# Altium PCB HandTiePCB.PcbDoc
Units mil, origin at the board's own origin, x right, y up, seen from the top; angles counter-clockwise.
Board outline 6000 x 4000 mil, 2 copper layers (Top Layer, Bottom Layer); 49 components, 53 nets, 217 pads, 0 vias.
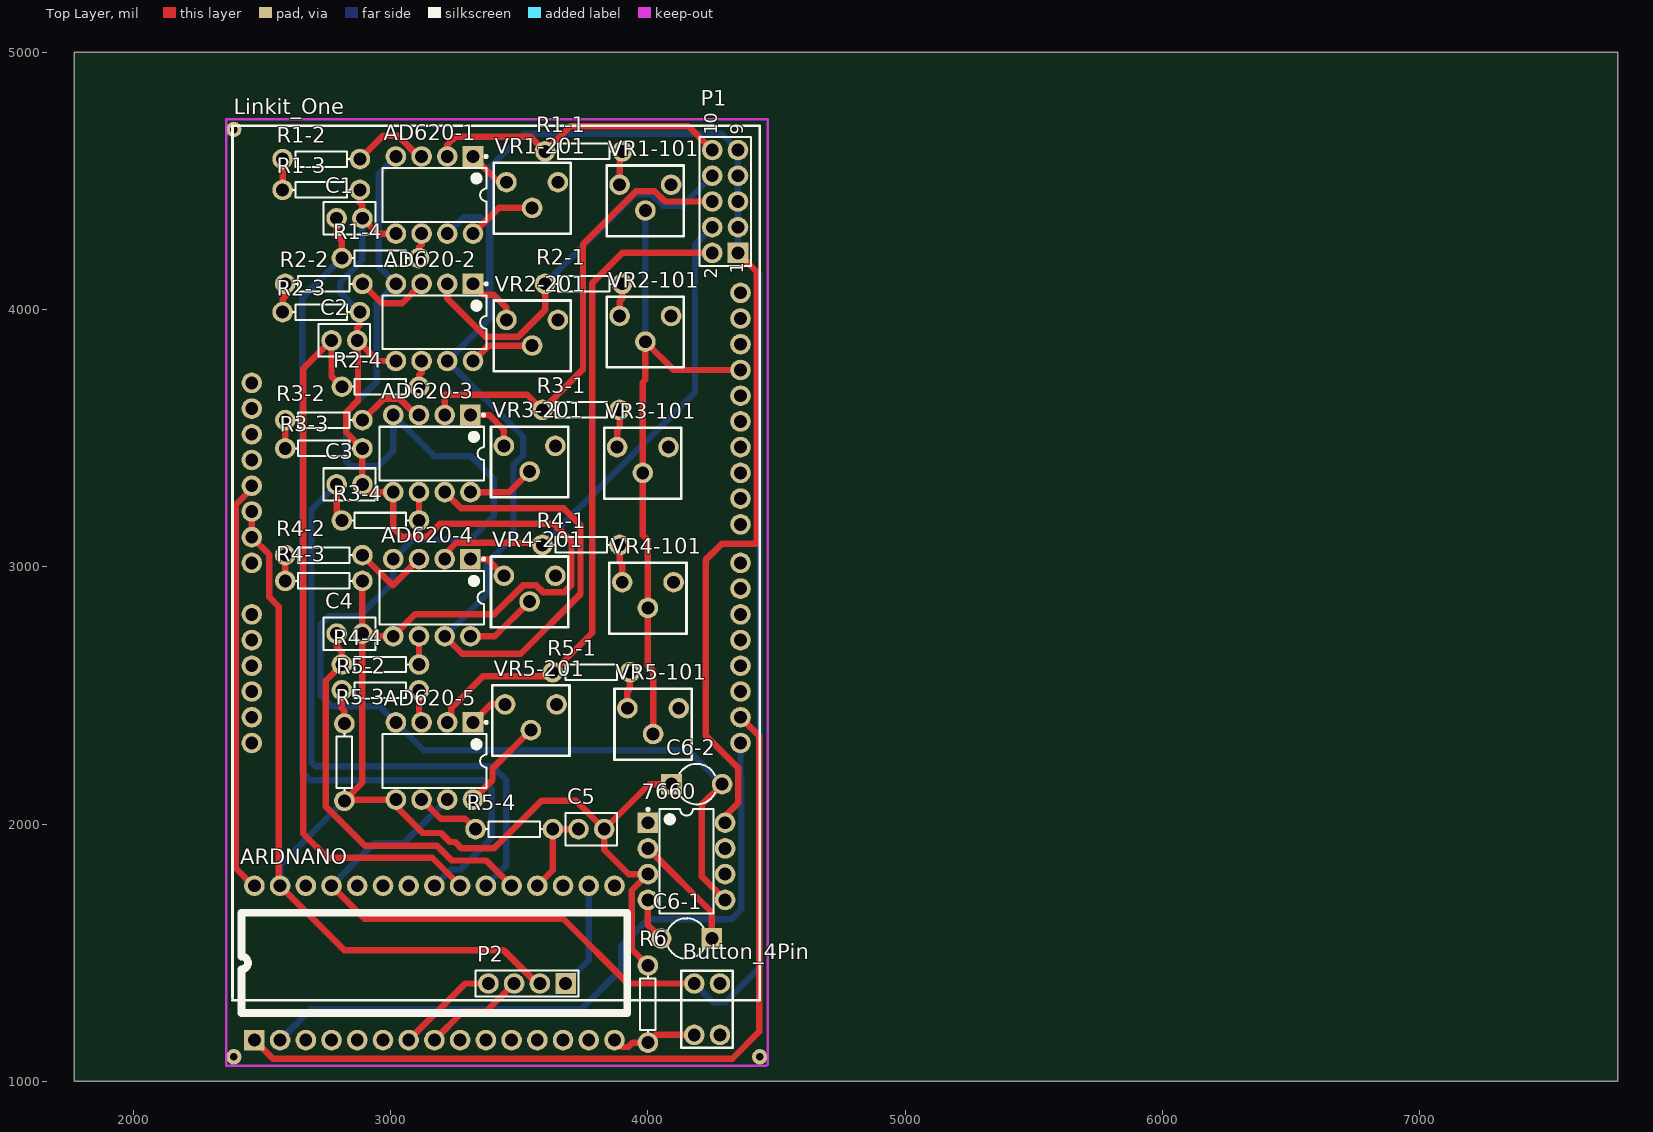
[diagram p0: Top Layer view]
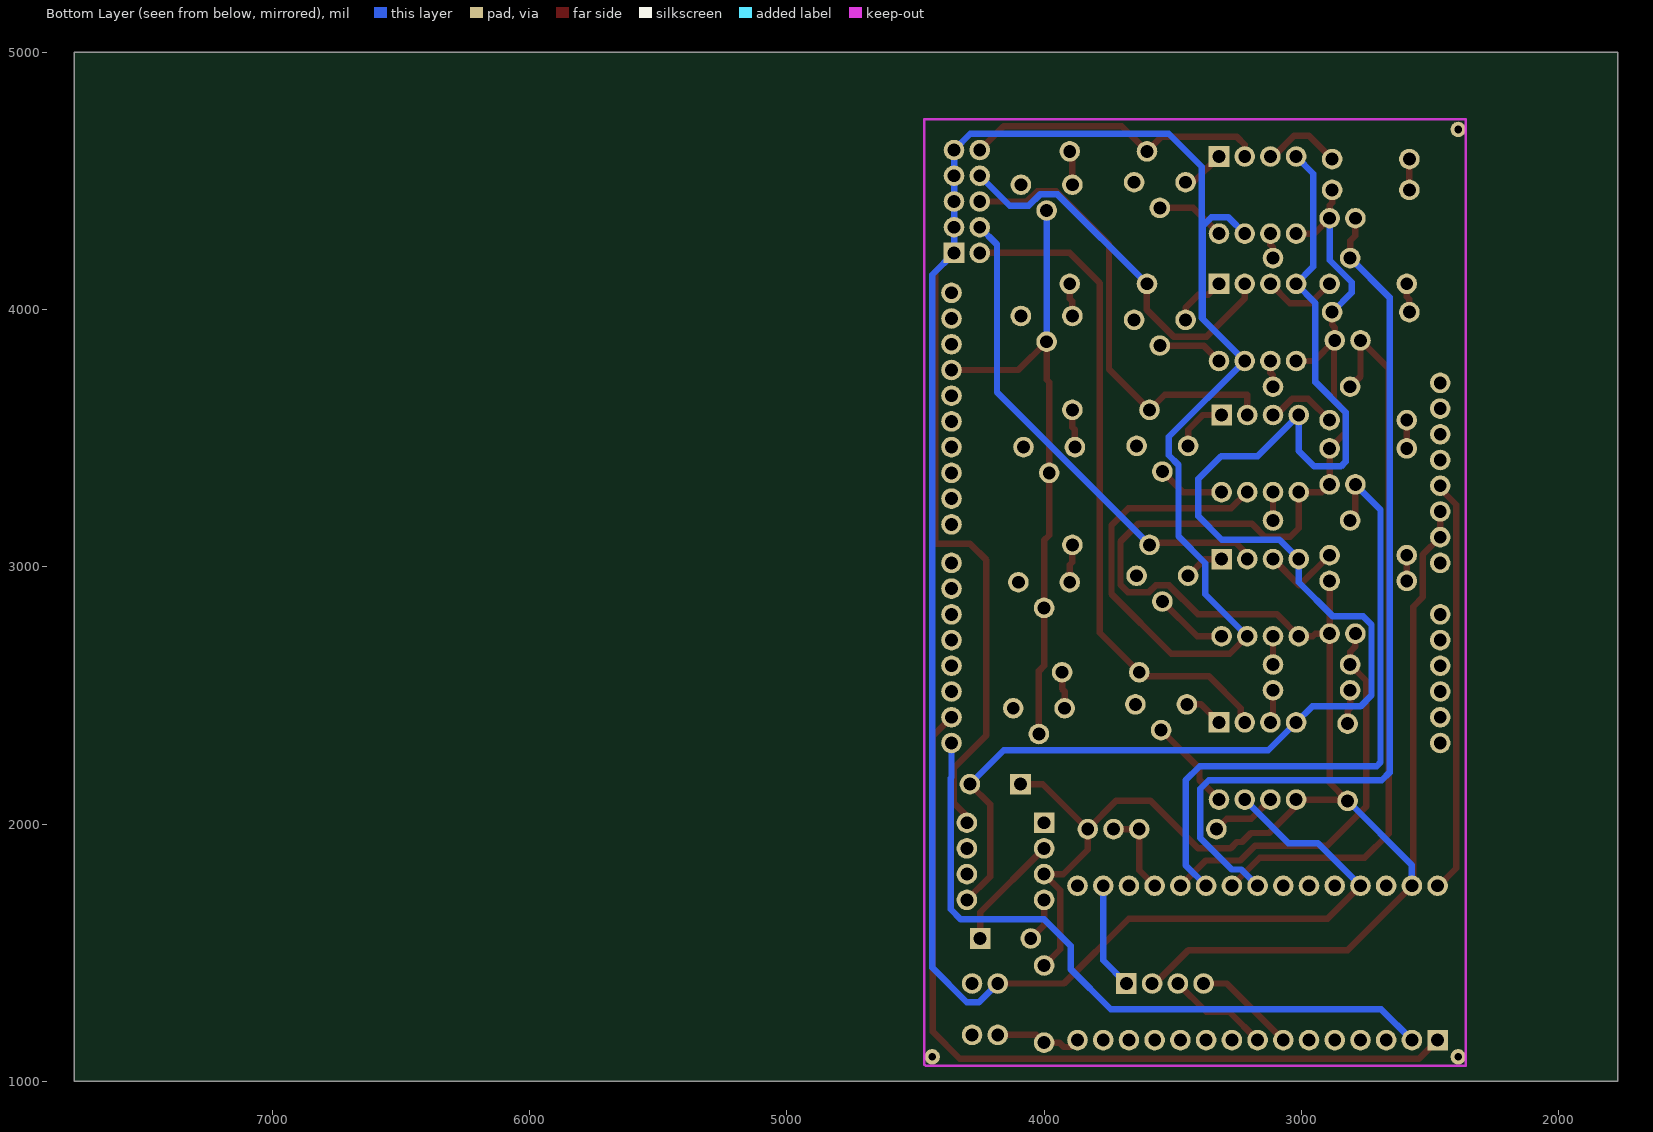
[diagram p1: Bottom Layer view, seen from below]

## Layer stack, top to bottom
Top Layer: signal copper 1.4
Dielectric: dielectric 12.6, FR-4, Dk 4.8
Bottom Layer: signal copper 1.4

## Board outline
1770,1000 7770,1000 7770,5000 1770,5000

## Design rules (kind name [scope] priority, off if disabled: settings)
Clearance [All] p1: gap=10
PolygonConnect [All] p1: connectstyle=Relief reliefconductorwidth=10 reliefentries=4 polygonreliefangle="90 Angle"
RoutingLayers [All] p1: top layer_v5=FALSE bottom layer_v5=TRUE
RoutingVias [All] p1: holewidth=28 width=50 viastyle="Through Hole" minholewidth=28 minwidth=50 maxholewidth=28 maxwidth=50
SilkscreenOverComponentPads [All] p1: minsilkscreentomaskgap=10
SolderMaskExpansion [All] p1: expansion=4
Width [All] p1: maxlimit=25 minlimit=25 preferedwidth=25
26 further rules are at their usual default settings.

## Components (designator, comment, footprint, x,y, rotation, side; value= is the part's Value field where it differs from the comment)
7660 "SW-DIP4" DIP-8 4150,1855 r0 top
AD620-1 "SW-DIP4" DIP-8 3170,4445 r270 top
AD620-2 "SW-DIP4" DIP-8 3170,3950 r270 top
AD620-3 "SW-DIP4" DIP-8 3160,3440 r270 top
AD620-4 "SW-DIP4" DIP-8 3160,2880 r270 top
AD620-5 "SW-DIP4" DIP-8 3170,2245 r270 top
ARDNANO "Arduino Nano" ARDNANO_DIP30 2470,1160 r90 top
Button_4Pin "Button_4Pin" Button_4Pin 4180,1180 r90 top
C1 "Cap" CAPR2.54-5.1x3.2 2840,4355 r0 top
C2 "Cap" CAPR2.54-5.1x3.2 2820,3880 r0 top
C3 "Cap" CAPR2.54-5.1x3.2 2840,3320 r0 top
C4 "Cap" CAPR2.54-5.1x3.2 2840,2740 r0 top
C5 "Cap" CAPR2.54-5.1x3.2 3780,1980 r0 top
C6-1 "Cap2" CAPR5-4X5 4150,1555 r180 top
C6-2 "Cap2" CAPR5-4X5 4190,2155 r0 top
Linkit_One "Linkit_One" Linkit_One 2460,3715 r0 top
P1 "Header 5X2" HDR2X5 4350,4220 r90 top
P2 "Header 4" HDR1X4 3680,1380 r180 top
R1-1 "Res1" AXIAL-0.3 3750,4615 r180 top
R1-2 "Res1" AXIAL-0.3 2730,4585 r0 top
R1-3 "Res1" AXIAL-0.3 2730,4465 r180 top
R1-4 "Res1" AXIAL-0.3 2960,4200 r0 top
R2-1 "Res1" AXIAL-0.3 3750,4100 r180 top
R2-2 "Res1" AXIAL-0.3 2740,4100 r0 top
R2-3 "Res1" AXIAL-0.3 2730,3990 r180 top
R2-4 "Res1" AXIAL-0.3 2960,3700 r0 top
R3-1 "Res1" AXIAL-0.3 3740,3610 r180 top
R3-2 "Res1" AXIAL-0.3 2740,3570 r0 top
R3-3 "Res1" AXIAL-0.3 2740,3460 r180 top
R3-4 "Res1" AXIAL-0.3 2960,3180 r0 top
R4-1 "Res1" AXIAL-0.3 3740,3085 r180 top
R4-2 "Res1" AXIAL-0.3 2740,3045 r0 top
R4-3 "Res1" AXIAL-0.3 2740,2945 r180 top
R4-4 "Res1" AXIAL-0.3 2960,2620 r0 top
R5-1 "Res1" AXIAL-0.3 3780,2590 r180 top
R5-2 "Res1" AXIAL-0.3 2960,2520 r0 top
R5-3 "Res1" AXIAL-0.3 2820,2240 r90 top
R5-4 "Res1" AXIAL-0.3 3480,1980 r180 top
R6 "Res1" AXIAL-0.3 4000,1300 r90 top
VR1-101 "VR" VarResistor 4090,4485 r180 top
VR1-201 "VR" VarResistor 3650,4495 r180 top
VR2-101 "VR" VarResistor 4090,3975 r180 top
VR2-201 "VR" VarResistor 3650,3960 r180 top
VR3-101 "VR" VarResistor 4080,3465 r180 top
VR3-201 "VR" VarResistor 3640,3470 r180 top
VR4-101 "VR" VarResistor 4100,2940 r180 top
VR4-201 "VR" VarResistor 3640,2965 r180 top
VR5-101 "VR" VarResistor 4120,2450 r180 top
VR5-201 "VR" VarResistor 3645,2465 r180 top

## Footprints (in the part's own frame and the unit in brackets; to place one, negate y for a bottom-side part, rotate by r counter-clockwise, add the part's x,y. Pads: shape width x height; smd on the part's side, far side on the other; paste and mask are expansions set on the pad)
ARDNANO_DIP30 [mil]
  rect 80x80 hole 50 mask+4: 1(0,0)
  round 80 hole 50 mask+4: 2(0,-100) 3(0,-200) 4(0,-300) 5(0,-400) 6(0,-500) 7(0,-600) 8(0,-700) 9(0,-800) 10(0,-900) 11(0,-1000) 12(0,-1100) 13(0,-1200) 14(0,-1300) 15(0,-1400) 16(600,-1400) 17(600,-1300) 18(600,-1200) 19(600,-1100) 20(600,-1000) 21(600,-900) 22(600,-800) 23(600,-700) 24(600,-600) 25(600,-500) 26(600,-400) 27(600,-300) 28(600,-200) 29(600,-100) 30(600,0)
  silkscreen extent 105,-1450 495,50
AXIAL-0.3 [mil] "Axial Device, Thru-Hole; 2 Leads; 0.3 in Pin Spacing"
  round 80 hole 50 mask+4: 1(-150,0) 2(150,0)
  silkscreen extent -109,-30 109,30
Button_4Pin [mil]
  round 80 hole 50 mask+4: 1(0,0) 2(0,-100) 3(200,-100) 4(200,0)
  silkscreen extent -50,-150 250,50
CAPR2.54-5.1x3.2 [mil] "Capacitor, Ceramic, Thru-Hole, Dipped Radial; Body 5.1 x 3.2 mm (WxT) Pin Spacing 2.54 mm (typ)"
  round 80 hole 50 mask+4: 1(-50,0) 2(50,0)
  silkscreen extent -100,-63 100,63
CAPR5-4X5 [mil] "Capacitor; 2 Leads"
  rect 80x80 hole 50 mask+4: 1(-98.43,0)
  round 80 hole 50 mask+4: 2(98.43,0)
  silkscreen extent -66,-79 72,79
DIP-8 [mil] "DIP; 8 Leads; Row Spacing 7.62 mm; Pitch 2.54 mm"
  rect 80x80 hole 50 mask+4: 1(-150,150)
  round 80 hole 50 mask+4: 2(-150,50) 3(-150,-50) 4(-150,-150) 5(150,-150) 6(150,-50) 7(150,50) 8(150,150)
  silkscreen extent -155,-203 104,206, body extent -142,-203 142,203, height 200
HDR1X4 [mil] "Connector; Header; 4 Position"
  rect 80x80 hole 50: 1(0,0)
  round 80 hole 50: 2(100,0) 3(200,0) 4(300,0)
  silkscreen extent -50,-50 350,50
HDR2X5 [mil] "Connector; Header; 5x2 Position"
  rect 80x80 hole 50: 1(0,0)
  round 80 hole 50: 2(0,100) 3(100,0) 4(100,100) 5(200,0) 6(200,100) 7(300,0) 8(300,100) 9(400,0) 10(400,100)
  silkscreen extent -50,-50 450,150
Linkit_One [mil]
  round 80 hole 50 mask+4: 1(0,0) 2(0,-100) 3(0,-200) 4(0,-300) 5(0,-400) 6(0,-500) 7(0,-600) 8(0,-700) 9(0,-900) 10(0,-1000) 11(0,-1100) 12(0,-1200) 13(0,-1300) 14(0,-1400) 15(1900,-1400) 16(1900,-1300) 17(1900,-1200) 18(1900,-1100) 19(1900,-1000) 20(1900,-900) 21(1900,-800) 22(1900,-700) 23(1900,-550) 24(1900,-450) 25(1900,-350) 26(1900,-250) 27(1900,-150) 28(1900,-50) 29(1900,50) 30(1900,150) 31(1900,250) 32(1900,350)
  silkscreen extent -75,-2400 1975,1000
VarResistor [mil]
  round 80 hole 50 mask+4: 1(0,0) 2(100,100) 3(200,0)
  silkscreen extent -50,-75 250,200

## Part data
7660 AD620-1 AD620-2 AD620-3 AD620-4 AD620-5: "DIP Switch"
C1 C2 C3 C4 C5 C6-1 C6-2: "Capacitor"
P1: "Header, 5-Pin, Dual row"
P2: "Header, 4-Pin"
R1-1 R1-2 R1-3 R1-4 R2-1 R2-2 R2-3 R2-4 R3-1 R3-2 R3-3 R3-4 R4-1 R4-2 R4-3 R4-4 R5-1 R5-2 R5-3 R5-4 R6: "Resistor"
VR1-101 VR1-201 VR2-101 VR2-201 VR3-101 VR3-201 VR4-101 VR4-201 VR5-101 VR5-201: library part VarR

## Free pads (board coordinates)
  round 60 hole 30: 0(2390,4700) 1(2390,1095) 2(4435,1095)

## Nets (pads, with @x,y where several pads share a name; then routed paths per layer and width w, separated by ;. In a path a pad name is that pad's centre, name@x,y a point inside that pad or via, vN(x,y) a via of type N, cw(c..) or ccw(c..) an arc to the next point about the centre after c; other vN are vias at no path point)
GND: 7660.3 AD620-1.5 AD620-2.5 AD620-3.5 AD620-4.5 AD620-5.5 ARDNANO.29 C1.2 C2.2 C3.2 C4.2 C5.2 C6-2.1 Linkit_One.6 Linkit_One.7 P2.2 R1-3.1 R2-3.1 R3-3.1 R4-3.1 R5-3.1 R6.2 | length 9965
  Top Layer w25: Linkit_One.6 Linkit_One.7 2527.5,3047.5 2527.5,2882.5 2565,2845 ARDNANO.29@2565,1765 ; ARDNANO.29@2565,1755 ARDNANO.29@2565,1765 ; R5-3.1 R5-3.1@2825,2095 ; R2-3.1 2880,3940 2870,3930 C2.2 ; R1-3.1 2880,4415 2890,4405 C1.2 2950,4295 AD620-1.5 ; R4-3.1 C4.2 ; AD620-2.5 2950,3800 C2.2 ; P2.2@3575,1380 3568.39,1380 3438.39,1510 2820,1510 ARDNANO.29 ARDNANO.29@2565,1765 ; R6.2 3937,1513 3937,1742 7660.3 3925,1805 3830,1900 C5.2 ; C6-2.1 4005,2155 C5.2 ; R5-3.1@2825,2095 AD620-5.5 3020,2070 3125,1965 3195.2,1965 3230.2,1930 3250.49,1930 3275.49,1905 3401,1905 3587,2091 3719,2091 C5.2 ; R5-3.1@2825,2095 2890,2160 C4.2 ; C2.2 2873,3837 2873,3646 2827,3600 2827,3523 R3-3.1 C3.2 2920,3290 AD620-3.5 3010,3150 3043,3117 3142,3117 3193,3168 3633,3168 3703,3098 3703,2929.61 3675,2901.61 3591.78,2901.61 3565.89,2927.5 3514.11,2927.5 3402.61,2816 3096,2816 AD620-4.5 2955,2730 2945,2740 C4.2
  Bottom Layer w25: ARDNANO.29 2570,1840 R5-3.1 ; R2-3.1 2804,4066 2804,4105.61 2890,4191.61 C1.2
GND2: Linkit_One.29 VR1-101.2 VR2-101.2 VR3-101.2 VR4-101.2 VR5-101.2 | length 2471.3
  Top Layer w25: VR5-101.2 4020,2595 4000,2615 VR4-101.2 4000,3103 3980,3123 VR3-101.2 3980,3717 3990,3727 VR2-101.2 4100,3765 Linkit_One.29
  Bottom Layer w25: VR2-101.2 VR1-101.2
Net7660_2: 7660.2 C6-1.1 | length 452.9
  Top Layer w25: 7660.2 4248.43,1656.57 C6-1.1
Net7660_4: 7660.4 C6-1.2 | length 171.4
  Top Layer w25: 7660.4 4000,1606.57 C6-1.2
Net7660_5: 7660.5 AD620-1.4 AD620-2.4 AD620-3.4 AD620-4.4 AD620-5.4 C6-2.2 | length 5715.1
  Top Layer w25: C6-2.2 4210,2076.57 4210,1795 7660.5
  Bottom Layer w25: AD620-1.4 2953,4528 2953,4167 AD620-2.4 2945,4025 2945,3718 2827,3600 2827,3409 2846,3390 2950,3390 3010,3450 AD620-3.4 3170,3430 3312,3430 3400,3342 3400,3196 3309,3105 3085,3105 AD620-4.4 3010,2940 2877,2807 2759,2807 2727,2775 2727,2500 2770,2457 2958,2457 AD620-5.4 3128,2287 4156.43,2287 C6-2.2
NetAD620-1_1: AD620-1.1 VR1-201.3 | length 171.4
  Top Layer w25: AD620-1.1 3420,4495 VR1-201.3
NetAD620-1_2: AD620-1.2 P1.10 R1-1.2 | length 1190.3
  Top Layer w25: AD620-1.2 3220,4641 3250,4671 3544,4671 R1-1.2 3697.5,4712.5 4157.5,4712.5 P1.10
NetAD620-1_3: AD620-1.3 R1-2.2 | length 310.4
  Top Layer w25: R1-2.2 2970,4675 3028.39,4675 3108.39,4595 AD620-1.3
NetAD620-1_6: AD620-1.6 R1-4.2 | length 99.1
  Top Layer w25: R1-4.2 3110,4242 3120,4252 AD620-1.6
NetAD620-1_8: AD620-1.8 VR1-201.2 | length 271.4
  Top Layer w25: AD620-1.8 3420,4395 VR1-201.2
NetAD620-2_1: AD620-2.1 VR2-201.3 | length 215.8
  Top Layer w25: AD620-2.1 3362.5,4057.5 3400,4057.5 3450,4007.5 VR2-201.3
NetAD620-2_2: AD620-2.2 P1.8 R2-1.2 | length 1503.6
  Top Layer w25: AD620-2.2 3220,4043 3368,3895 3496.61,3895 3600,3998.39 R2-1.2
  Bottom Layer w25: R2-1.2 3947.5,4447.5 4015.89,4447.5 4060.39,4403 4133,4403 P1.8
NetAD620-2_3: AD620-2.3 R2-2.2 | length 292.1
  Top Layer w25: R2-2.2 2965,4025 3045,4025 AD620-2.3
NetAD620-2_6: AD620-2.6 R2-4.2 | length 104.1
  Top Layer w25: R2-4.2 3110,3745 3120,3755 AD620-2.6
NetAD620-2_8: AD620-2.8 VR2-201.2 | length 254.9
  Top Layer w25: AD620-2.8 3380,3860 VR2-201.2
NetAD620-3_1: AD620-3.1 VR3-201.3 | length 216.6
  Top Layer w25: AD620-3.1 3383,3590 3440,3533 VR3-201.3
NetAD620-3_2: AD620-3.2 P1.6 R3-1.2 | length 1797.1
  Top Layer w25: AD620-3.2 3210,3669 3531,3669 R3-1.2 3747.5,3767.5 3747.5,4254.11 3953.39,4460 4026.61,4460 4066.61,4420 P1.6
NetAD620-3_3: AD620-3.3 R3-2.2 | length 280.1
  Top Layer w25: R3-2.2 2972.5,3652.5 3035.89,3652.5 3098.39,3590 AD620-3.3
NetAD620-3_6: AD620-3.6 R3-4.2 | length 110
  Top Layer w25: R3-4.2 AD620-3.6
NetAD620-3_8: AD620-3.8 VR3-201.2 | length 263.1
  Top Layer w25: AD620-3.8 3460,3290 VR3-201.2
NetAD620-4_1: AD620-4.1 VR4-201.3 | length 156.9
  Top Layer w25: AD620-4.1 3375,3030 VR4-201.3
NetAD620-4_2: AD620-4.2 P1.4 R4-1.2 | length 1928.1
  Top Layer w25: AD620-4.2 3210,3047.64 3255.36,3093 3582,3093 R4-1.2
  Bottom Layer w25: R4-1.2 4183,3678 4183,4253 P1.4
NetAD620-4_3: AD620-4.3 R4-2.2 | length 311.1
  Top Layer w25: R4-2.2 3007.5,2927.5 AD620-4.3
NetAD620-4_6: AD620-4.6 R4-4.2 | length 110
  Top Layer w25: R4-4.2 AD620-4.6
NetAD620-4_8: AD620-4.8 VR4-201.2 | length 285.9
  Top Layer w25: AD620-4.8 3405,2730 VR4-201.2
NetAD620-5_1: AD620-5.1 VR5-201.3 | length 154
  Top Layer w25: AD620-5.1 3390,2465 VR5-201.3
NetAD620-5_2: AD620-5.2 P1.2 R5-1.2 | length 2606
  Top Layer w25: AD620-5.2 3235,2410 3235,2450 3360,2575 3615,2575 R5-1.2 3783,2743 3783,4103 3900,4220 P1.2
NetAD620-5_3: AD620-5.3 R5-2.2 | length 129.1
  Top Layer w25: R5-2.2 3110,2405 AD620-5.3
NetAD620-5_6: AD620-5.6 R5-4.2 | length 257.6
  Top Layer w25: AD620-5.6 3195,2020 3290,2020 R5-4.2
NetAD620-5_8: AD620-5.8 VR5-201.2 | length 363.2
  Top Layer w25: AD620-5.8 3395.75,2170.75 3395.75,2215.75 VR5-201.2
NetARDNANO_1: ARDNANO.1 Linkit_One.16 | length 3289
  Top Layer w25: ARDNANO.1 2542.5,1087.5 4327.5,1087.5 4433,1193 4433,2342 Linkit_One.16
NetARDNANO_2: ARDNANO.2 Linkit_One.15 | length 2705
  Bottom Layer w25: ARDNANO.2 2690,1280 3741,1280 3897,1436 3897,1527 4000,1630 4325,1630 4363,1668 4363,2178 4360,2181 Linkit_One.15
NetARDNANO_7: ARDNANO.7 P2.4 | length 401.1
  Top Layer w25: ARDNANO.7 3290,1380 P2.4
NetARDNANO_8: ARDNANO.8 P2.3 | length 401.1
  Top Layer w25: ARDNANO.8 3280,1270 3370,1270 P2.3
NetARDNANO_15: ARDNANO.15 Button_4Pin.1 R6.1 | length 340.7
  Top Layer w25: ARDNANO.15 3897,1133 3923,1133 3940,1150 R6.1 4030,1180 Button_4Pin.1
NetARDNANO_17: ARDNANO.17 P2.1 | length 417.3
  Bottom Layer w25: P2.1 3770,1470 ARDNANO.17
NetARDNANO_19: ARDNANO.19 C5.1 R5-4.1 | length 344.9
  Top Layer w25: ARDNANO.19 3630,1820 R5-4.1 C5.1
NetARDNANO_20: ARDNANO.20 C4.1 R4-4.1 | length 1557
  Top Layer w25: C4.1 2790,2690 2810,2670 R4-4.1 2747,2557 2747,2068 2900,1915 3180,1915 3237,1858 3372,1858 ARDNANO.20
NetARDNANO_21: ARDNANO.21 C3.1 R3-4.1 | length 2510.7
  Top Layer w25: C3.1 2790,3180 R3-4.1
  Bottom Layer w25: C3.1 2692,3222 2692,2240 2707,2225 3395,2225 3450,2170 3450,1840 ARDNANO.21
NetARDNANO_22: ARDNANO.22 C2.1 R2-4.1 | length 2852.8
  Top Layer w25: R2-4.1 2770,3740 C2.1 2660.5,3770.5 2660.5,1962.5 2754,1869 3161,1869 ARDNANO.22
NetARDNANO_23: ARDNANO.23 C1.1 R1-4.1 | length 3479.4
  Top Layer w25: C1.1 2790,4287 2810,4267 R1-4.1
  Bottom Layer w25: R1-4.1 2657,4047 2657,2200 2687,2170 3360,2170 3392.5,2137.5 3392.5,1945.5 3270,1823 3233,1823 ARDNANO.23
NetARDNANO_30: ARDNANO.30 Linkit_One.5 | length 1615.9
  Top Layer w25: Linkit_One.5 2460,3303.39 2397.5,3240.89 2397.5,1827.5 ARDNANO.30@2470,1755
NetR1-1_1: R1-1.1 VR1-101.3 | length 134.1
  Top Layer w25: VR1-101.3 3890,4605 R1-1.1
NetR1-2_1: R1-2.1 R1-3.2 | length 120
  Top Layer w25: R1-3.2 R1-2.1
NetR2-1_1: R2-1.1 VR2-101.3 | length 129.1
  Top Layer w25: VR2-101.3 3890,4032 3900,4042 R2-1.1
NetR2-2_1: R2-2.1 R2-3.2 | length 114.1
  Top Layer w25: R2-3.2 2580,4040 2590,4050 R2-2.1
NetR3-1_1: R3-1.1 VR3-101.3 | length 149.1
  Top Layer w25: VR3-101.3 3880,3532 3890,3542 R3-1.1
NetR3-2_1: R3-2.1 R3-3.2 | length 110
  Top Layer w25: R3-3.2 R3-2.1
NetR4-1_1: R4-1.1 VR4-101.3 | length 149.1
  Top Layer w25: R4-1.1 3890,3017 3900,3007 VR4-101.3
NetR4-2_1: R4-2.1 R4-3.2 | length 100
  Top Layer w25: R4-3.2 R4-2.1
NetR5-1_1: R5-1.1 VR5-101.3 | length 144.1
  Top Layer w25: VR5-101.3 3920,2515 3930,2525 R5-1.1
NetR5-2_1: R5-2.1 R5-3.2 | length 134.1
  Top Layer w25: R5-2.1 2810,2450 2820,2440 R5-3.2
VCC: 7660.8 AD620-1.7 AD620-2.7 AD620-3.7 AD620-4.7 AD620-5.7 ARDNANO.27 Button_4Pin.4 P1.1 P1.3 P1.5 P1.7 P1.9 | length 13441.2
  Top Layer w25: ARDNANO.27 2898,1632 3670.5,1632 3922.5,1380 Button_4Pin.4 ; AD620-4.7 3278,2662 3506,2662 3738,2894 3738,3160.92 3671.92,3227 3273,3227 AD620-3.7 ; 7660.8 4300,2031 4351,2082 4351,2218 4224,2345 4224,3026 4288,3090 4423,3090 4423,4147 P1.1
  Bottom Layer w25: ARDNANO.27 2935,1925 3050,1925 AD620-5.7 ; AD620-4.7 3373,2893 3373,3014 3477.5,3118.5 3477.5,3395.89 3515,3433.39 3515,3505 AD620-2.7 3383,3963 ; AD620-1.7 3283,4358 3350,4358 3383,4325 3383,3963 ; Button_4Pin.4 4253,1307 4300,1307 4435,1442 4435,4135 P1.1 P1.3 P1.5 P1.7 P1.9 4287,4683 3515,4683 3387,4555 3387,3967 3383,3963
pads on no net: 7660.1 7660.6 7660.7 ARDNANO.3 ARDNANO.4 ARDNANO.5 ARDNANO.6 ARDNANO.9 ARDNANO.10 ARDNANO.11 ARDNANO.12 ARDNANO.13 ARDNANO.14 ARDNANO.16 ARDNANO.18 ARDNANO.24 ARDNANO.25 ARDNANO.26 ARDNANO.28 Button_4Pin.2 Button_4Pin.3 Linkit_One.1 Linkit_One.2 Linkit_One.3 Linkit_One.4 Linkit_One.8 Linkit_One.9 Linkit_One.10 Linkit_One.11 Linkit_One.12 Linkit_One.13 Linkit_One.14 Linkit_One.17 Linkit_One.18 Linkit_One.19 Linkit_One.20 Linkit_One.21 Linkit_One.22 Linkit_One.23 Linkit_One.24 Linkit_One.25 Linkit_One.26 Linkit_One.27 Linkit_One.28 Linkit_One.30 Linkit_One.31 Linkit_One.32 VR1-101.1 VR1-201.1 VR2-101.1 VR2-201.1 VR3-101.1 VR3-201.1 VR4-101.1 VR4-201.1 VR5-101.1 VR5-201.1

## Keep-outs
Keep-Out Layer:
  lines w10: 2360,1060 4460,1060 4465,1065 4465,4740 2360,4740 2360,1060

## Text inside footprints (layer, text, board x,y; h text height)
P1: Top Overlay "10" at 4270,4680 h50 r90; Top Overlay "9" at 4370,4680 h50 r90; Top Overlay "1" at 4370,4140 h50 r90; Top Overlay "2" at 4270,4120 h50 r90